# EAGLE board Expanssion Bay (EAGLE 9.5.1)
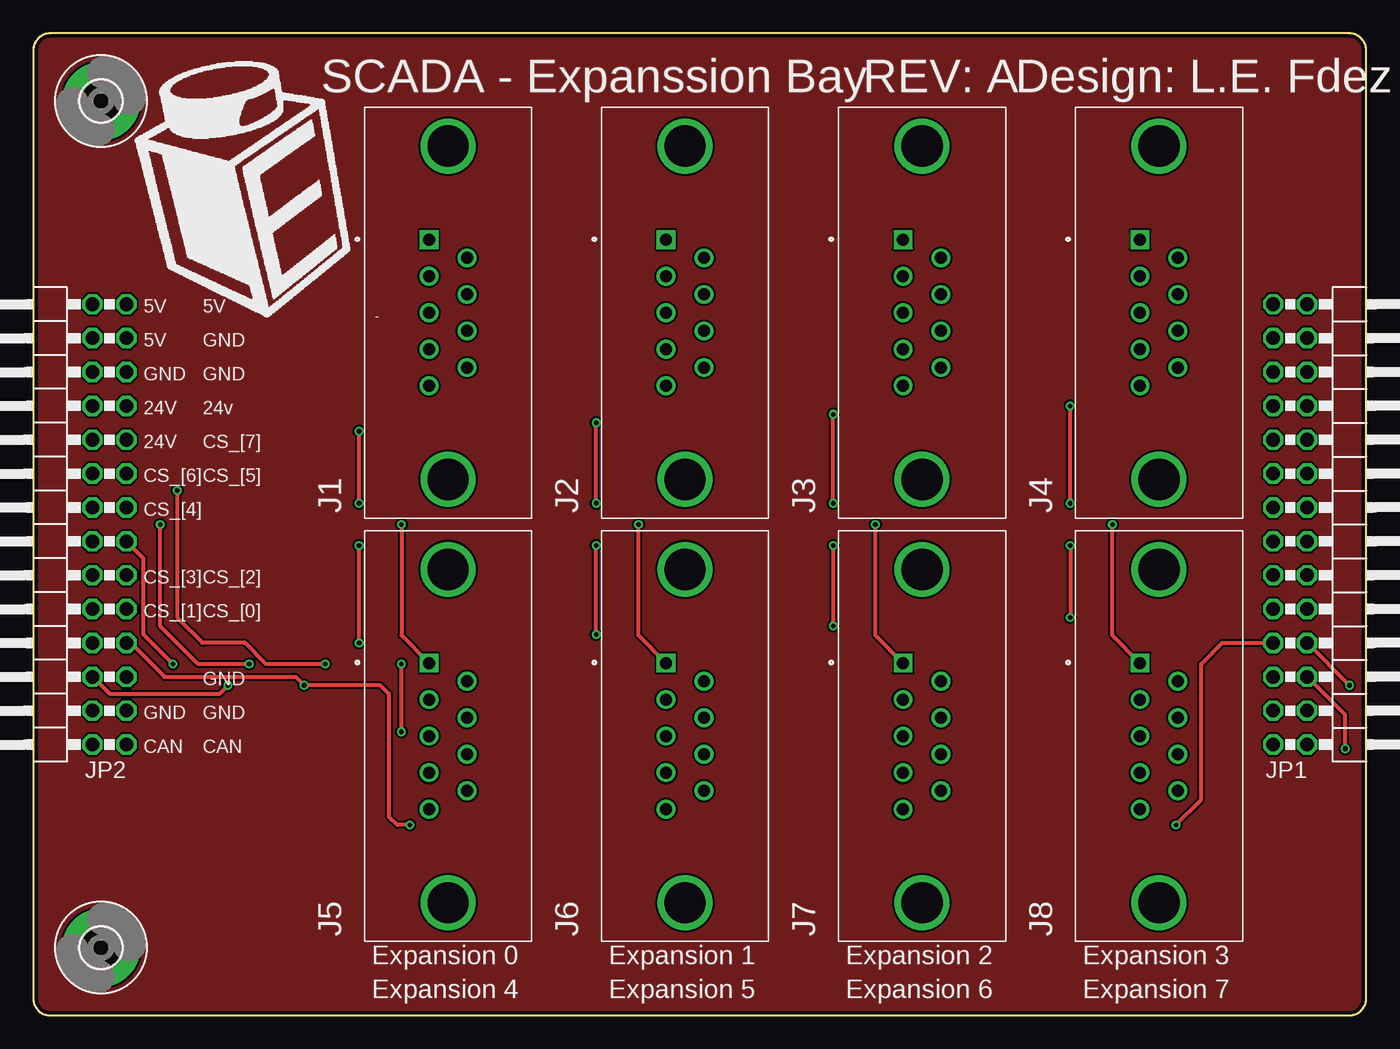
[diagram p0: board, top side]
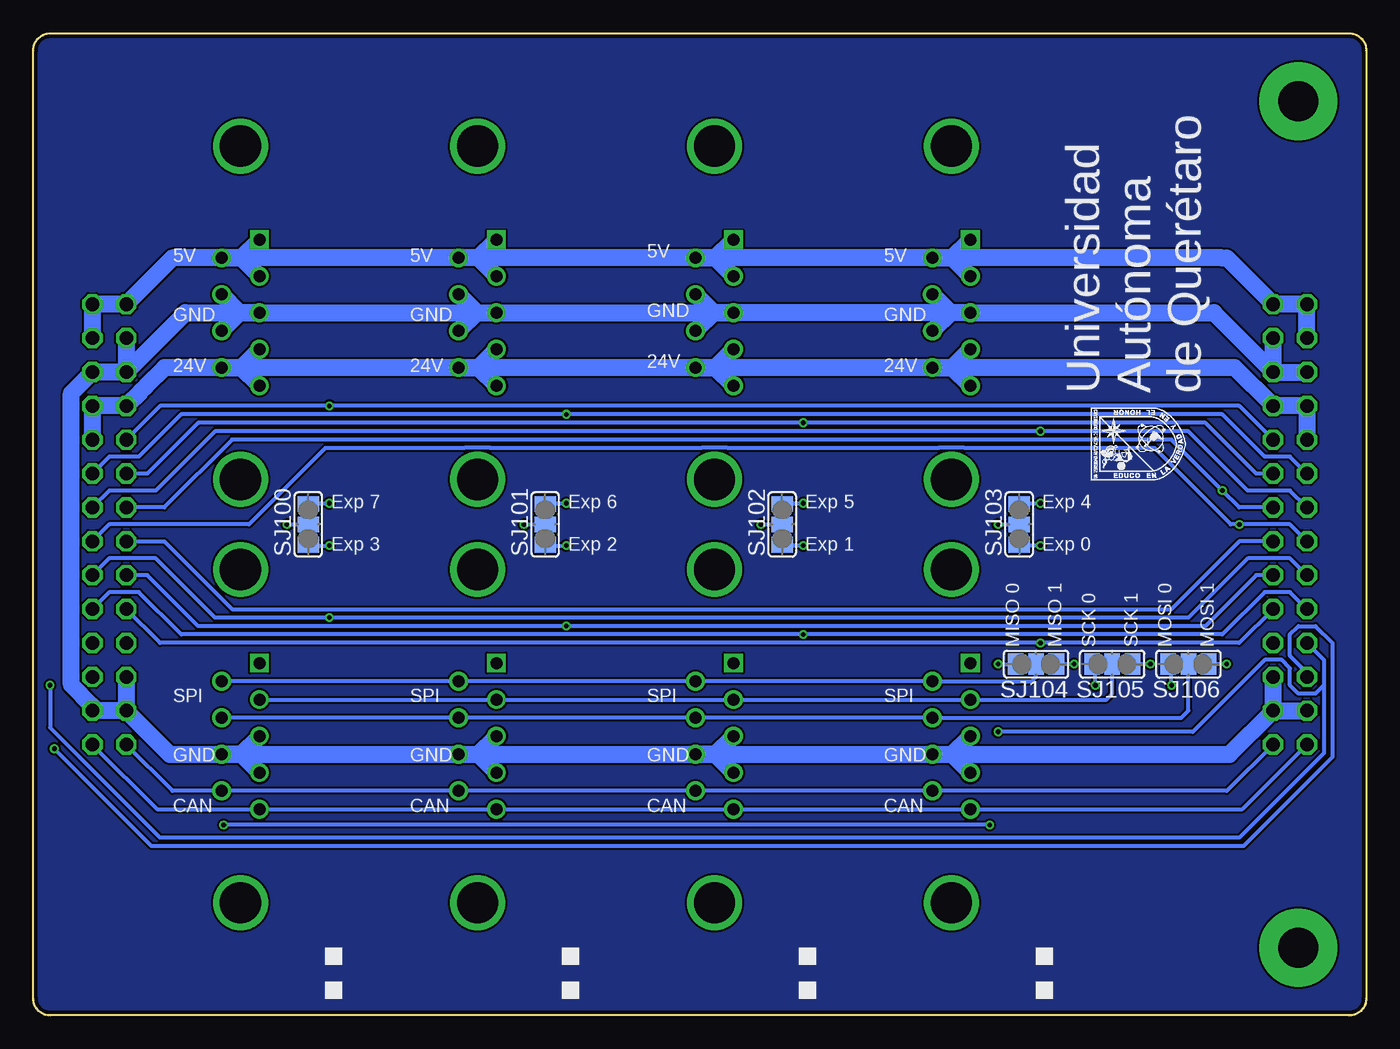
[diagram p1: board, bottom side, seen from below]

Size 100 x 73.66 mm. Coordinates in mm from the lower left corner, seen from the top.
Outline: 0,72.39 0,1.27 arc90 1.27,0 98.73,0 arc90 100,1.27 100,72.39 arc90 98.73,73.66 1.27,73.66 arc90 0,72.39
Copper layers (1*16): Top 0.035mm / dielectric 1.5mm / Bottom 0.035mm
Design rules "SeeedStudio_2layer_DRU_no_angle_20140221": minimum track width 6mil, minimum drill 12mil, track to track 6mil, track to pad 6mil, pad to pad 6mil, via to via 6mil, smd to smd 0mil, copper to edge 10mil, drill to drill 10mil, minimum pad ring 10mil, minimum via ring 6mil, stop-mask expansion 2mil, vias tented up to drill 100mil, thermal gap 10mil

## Footprints (pad centres in the part's own frame; a part is rotated, then mirrored left to right if it is on the bottom)
3,0-PAD = drill 3 pad 5.842: B3,0 0,0
LD09S24A4GV00LF = drill 0.9 square: 1 5.48,1.42 | drill 0.9: 2 2.74,1.42; 3 0,1.42; 4 -2.74,1.42; 5 -5.48,1.42; 6 4.11,-1.42; 7 1.37,-1.42; 8 -1.37,-1.42; 9 -4.11,-1.42 | drill 3.1: MH1 -12.495,0; MH2 12.495,0
2X14/90 = drill 1.016 octagon: 1 -16.51,-6.35; 2 -16.51,-3.81; 3 -13.97,-6.35; 4 -13.97,-3.81; 5 -11.43,-6.35; 6 -11.43,-3.81; 7 -8.89,-6.35; 8 -8.89,-3.81; 9 -6.35,-6.35; 10 -6.35,-3.81; 11 -3.81,-6.35; 12 -3.81,-3.81; 13 -1.27,-6.35; 14 -1.27,-3.81; 15 1.27,-6.35; 16 1.27,-3.81; 17 3.81,-6.35; 18 3.81,-3.81; 19 6.35,-6.35; 20 6.35,-3.81; 21 8.89,-6.35; 22 8.89,-3.81; 23 11.43,-6.35; 24 11.43,-3.81; 25 13.97,-6.35; 26 13.97,-3.81; 27 16.51,-6.35; 28 16.51,-3.81
SJ_2 = smd 1.168 x 1.6: 1 -1.524,0; 2 0,0; 3 1.524,0

## Placement (x,y rotation side)
H1  MOUNT-PAD-ROUND3.0  [3,0-PAD]  5.08,68.58 0 top
H2  MOUNT-PAD-ROUND3.0  [3,0-PAD]  5.08,5.08 0 top
J1  LD09S24A4GV00LF  [LD09S24A4GV00LF]  31.11,52.7 90 top
J2  LD09S24A4GV00LF  [LD09S24A4GV00LF]  48.9,52.7 90 top
J3  LD09S24A4GV00LF  [LD09S24A4GV00LF]  66.67,52.7 90 top
J4  LD09S24A4GV00LF  [LD09S24A4GV00LF]  84.45,52.7 90 top
J5  LD09S24A4GV00LF  [LD09S24A4GV00LF]  31.11,20.95 90 top
J6  LD09S24A4GV00LF  [LD09S24A4GV00LF]  48.9,20.95 90 top
J7  LD09S24A4GV00LF  [LD09S24A4GV00LF]  66.67,20.95 90 top
J8  LD09S24A4GV00LF  [LD09S24A4GV00LF]  84.45,20.95 90 top
JP1  [2X14/90]  99.38,36.83 270 top
JP2  [2X14/90]  0.64,36.83 90 top
SJ100  [SJ_2]  79.38,36.83 90 bottom
SJ101  [SJ_2]  61.59,36.83 90 bottom
SJ102  [SJ_2]  43.81,36.83 90 bottom
SJ103  [SJ_2]  26.04,36.83 90 bottom
SJ104  [SJ_2]  24.77,26.35 0 bottom
SJ105  [SJ_2]  19.05,26.35 0 bottom
SJ106  [SJ_2]  13.34,26.35 0 bottom

## Library data of the parts
H1 H2 = holes
J1-J8 = D-Sub Connectors; CREATED_BY: PCBLayout.com; DIGIKEY_PART_NUMBER: 609-5190-ND; MANUFACTURER: Amphenol ICC (FCI); MPN: LD09S24A4GV00LF
JP1 JP2 = pinhead
SJ100-SJ106 = jumper

## Nets
+24V: J1.4 J1.5 J1.9 J2.4 J2.5 J2.9 J3.4 J3.5 J3.9 J4.4 J4.5 J4.9 JP1.7 JP1.8 JP1.10 JP2.20 JP2.21 JP2.22
AGND: J1.3 J1.7 J1.8 J2.3 J2.7 J2.8 J3.3 J3.7 J3.8 J4.3 J4.7 J4.8 J5.3 J5.4 J5.8 J6.3 J6.4 J6.8 J7.3 J7.4 J7.8 J8.3 J8.4 J8.8 JP1.3 JP1.5 JP1.6 JP1.23 JP1.25 JP1.26 JP2.3 JP2.4 JP2.5 JP2.23 JP2.24 JP2.25
CAN_H: J5.5 J6.5 J7.5 J8.5 JP1.28 JP2.2
CAN_L: J5.9 J6.9 J7.9 J8.9 JP1.27 JP2.1
CS_0: JP1.19 JP2.9 SJ103.1
CS_1: JP1.20 JP2.10 SJ102.1
CS_2: JP1.17 JP2.11 SJ101.1
CS_3: JP1.18 JP2.12 SJ100.1
CS_4: JP1.14 JP2.16 SJ103.3
CS_5: JP1.11 JP2.17 SJ102.3
CS_6: JP1.12 JP2.18 SJ101.3
CS_7: JP1.9 JP2.19 SJ100.3
CS_A: J5.1 SJ103.2
CS_B: J6.1 SJ102.2
CS_C: J7.1 SJ101.2
CS_D: J8.1 SJ100.2
MISO: J5.6 J6.6 J7.6 J8.6 SJ104.2
MISO_0: JP1.22 JP2.8 SJ104.1
MISO_1: JP1.13 JP2.15 SJ104.3
MOSI: J5.7 J6.7 J7.7 J8.7 SJ106.2
MOSI_0: JP1.24 JP2.6 SJ106.1
MOSI_1: JP1.15 JP2.13 SJ106.3
SCK: J5.2 J6.2 J7.2 J8.2 SJ105.2
SCK_0: JP1.21 JP2.7 SJ105.1
SCK_1: JP1.16 JP2.14 SJ105.3
VCCA: J1.1 J1.2 J1.6 J2.1 J2.2 J2.6 J3.1 J3.2 J3.6 J4.1 J4.2 J4.6 JP1.1 JP1.2 JP1.4 JP2.26 JP2.27 JP2.28

## Tracks (layer width: path | path; a pad name or v marks a point on that pad's centre or on a via)
+24V
  Bottom 0.61: 91.6,47.15 91.92,46.83
  Bottom 1.27: JP2.20 JP2.22 JP2.21 9.86,48.59 J1.9 | J1.9 J2.9 | J2.9 J3.9 | J3.9 J4.9 | J4.9 90.15,48.59 91.6,47.15 | 91.92,46.83 JP1.7 JP1.8 JP1.10 | J4.5 84.41,48.59 | J4.9 84.41,48.59 | 84.41,48.59 J4.4 | 66.62,48.59 J3.4 | 31.07,48.59 J1.4 | J1.9 31.07,48.59 | 31.07,48.59 J1.5 | 48.84,48.59 J2.4 | J2.9 48.84,48.59 | 48.84,48.59 J2.5 | J3.9 66.62,48.59 | 66.62,48.59 J3.5
AGND
  Bottom 0.61: J1.3 29.77,52.63 29.84,52.7 J2.3 47.62,52.7
  Bottom 1.27: JP1.3 JP1.5 | JP1.5 JP1.6 97.16,46.67 97.16,24.8 95.57,23.21 JP1.26 JP1.25 | JP1.5 88.58,52.7 J4.3 | J4.3 J3.3 | J3.3 47.62,52.7 J1.3 | J1.3 11.43,52.7 JP2.23 | JP2.23 JP2.25 | JP2.23 JP2.24 | JP1.23 JP1.25 | JP1.25 89.75,19.59 J8.8 | J8.8 J7.8 | J7.8 J6.8 | J6.8 J5.8 | J5.8 10.26,19.59 JP2.3 | JP2.3 JP2.5 | JP2.3 JP2.4 | 31.07,19.59 J5.3 | J5.8 31.07,19.59 | 31.07,19.59 J5.4 | 48.84,19.59 J6.3 | J6.4 48.84,19.59 | 48.84,19.59 J6.8 | J7.4 66.62,19.59 | J7.8 66.62,19.59 | 66.62,19.59 J7.3 | 84.41,19.59 J8.3 | J8.4 84.41,19.59 | 84.41,19.59 J8.8 | J3.8 66.72,52.7 | J3.7 66.72,52.7 | 66.72,52.7 J3.3 | J4.8 84.5,52.7 | J4.3 84.5,52.7 | 84.5,52.7 J4.7 | 31.16,52.7 J1.7 | J1.3 31.16,52.7 | 31.16,52.7 J1.8 | 48.95,52.7 J2.8 | J2.3 48.95,52.7 | 48.95,52.7 J2.7
CAN_H
  Bottom 0.305: JP1.28 90.72,15.47 J8.5 J7.5 J6.5 J5.5 9.29,15.47 JP2.2
CAN_L
  Bottom 0.305: JP1.27 89.55,16.84 J8.9 J7.9 J6.9 J5.9 10.46,16.84 JP2.1
COPPER
  pour Top: 98.42,73.66 1.27,73.66 arc90 0,72.39 0,1.27 arc90 1.27,0 98.73,0 arc90 100,1.27 100,2 100,71 100,72 100,72.39 arc90 98.73,73.66
  pour Bottom: 100,1.27 100,72.39 arc90 98.73,73.66 1.27,73.66 arc90 0,72.39 0,1.27 arc90 1.27,0 98.73,0 arc90
CS_0  (via drill 0.35)
  Top 0.305: v24.45,27.94 v24.45,35.24
  Bottom 0.305: JP2.9 9.53,27.94 v24.45,27.94 90.49,27.94 JP1.19 | v24.45,35.24 25.97,35.24 SJ103.1
CS_1  (via drill 0.35)
  Top 0.305: v42.23,28.57 v42.23,35.24
  Bottom 0.305: JP2.10 5.71,31.75 7.62,31.75 10.79,28.57 v42.23,28.57 88.9,28.57 92.08,31.75 94.3,31.75 JP1.20 | v42.23,35.24 43.75,35.24 SJ102.1
CS_2  (via drill 0.35)
  Top 0.305: v60.01,35.24 v60.01,29.21
  Bottom 0.305: JP2.11 8.26,33.02 12.06,29.21 v60.01,29.21 87.63,29.21 91.44,33.02 JP1.17 | SJ101.1 61.53,35.24 v60.01,35.24
CS_3  (via drill 0.35)
  Top 0.305: v77.79,35.24 v77.79,29.84
  Bottom 0.305: JP2.12 5.71,34.29 8.89,34.29 13.34,29.84 v77.79,29.84 86.36,29.84 90.81,34.29 94.3,34.29 JP1.18 | SJ100.1 79.31,35.24 v77.79,35.24
CS_4  (via drill 0.35)
  Top 0.305: v24.45,38.42 v24.45,43.81
  Bottom 0.305: JP2.16 5.71,39.37 8.89,39.37 13.34,43.81 v24.45,43.81 86.36,43.81 90.81,39.37 94.3,39.37 JP1.14 | SJ103.3 25.97,38.42 v24.45,38.42
CS_5  (via drill 0.35)
  Top 0.305: v42.23,38.42 v42.23,44.45
  Bottom 0.305: JP2.17 8.26,40.64 12.06,44.45 v42.23,44.45 87.63,44.45 91.44,40.64 JP1.11 | SJ102.3 43.75,38.42 v42.23,38.42
CS_6  (via drill 0.35)
  Top 0.305: v60.01,38.42 v60.01,45.09
  Bottom 0.305: JP2.18 5.71,41.91 7.62,41.91 10.79,45.09 v60.01,45.09 88.9,45.09 92.08,41.91 94.3,41.91 JP1.12 | SJ101.3 61.53,38.42 v60.01,38.42
CS_7  (via drill 0.35)
  Top 0.305: v77.79,38.42 v77.79,45.72
  Bottom 0.305: JP2.19 9.53,45.72 v77.79,45.72 90.49,45.72 JP1.9 | SJ100.3 79.31,38.42 v77.79,38.42
CS_A  (via drill 0.35)
  Top 0.305: J5.1 27.62,28.51 v27.62,36.83
  Bottom 0.305: v27.62,36.83 SJ103.2
CS_B  (via drill 0.35)
  Top 0.305: J6.1 45.4,28.51 v45.4,36.83
  Bottom 0.305: v45.4,36.83 SJ102.2
CS_C  (via drill 0.35)
  Top 0.305: J7.1 63.18,28.51 v63.18,36.83
  Bottom 0.305: v63.18,36.83 SJ101.2
CS_D  (via drill 0.35)
  Top 0.305: J8.1 80.96,28.51 v80.96,36.83
  Bottom 0.305: v80.96,36.83 SJ100.2
MISO
  Bottom 0.305: J8.6 J7.6 J6.6 J5.6 25.1,25.07 24.77,25.4 SJ104.2
MISO_0  (via drill 0.35)
  Top 0.305: v27.62,21.27 v27.62,26.35 | v98.74,24.77 JP1.22
  Bottom 0.305: v27.62,26.35 SJ104.1 | v27.62,21.27 13.02,21.27 7.62,26.67 6.35,26.67 5.71,26.04 5.71,24.77 5.08,24.13 3.81,24.13 3.17,24.77 | 3.17,24.77 3.17,26.67 JP2.8 | v98.74,24.77 98.74,21.59 90.49,13.34 9.53,13.34 3.17,19.68 3.17,24.77
MISO_1  (via drill 0.35)
  Top 0.305: v10.79,39.37 10.79,29.84 12.7,27.94 15.88,27.94 17.46,26.35 v21.91,26.35
  Bottom 0.305: JP2.15 9.53,38.1 v10.79,39.37 14.61,43.18 85.09,43.18 90.17,38.1 JP1.13 | v21.91,26.35 SJ104.3
MOSI
  Bottom 0.305: J8.7 J7.7 J6.7 J5.7 13.87,22.32 13.34,22.86 SJ106.2
MOSI_0  (via drill 0.35)
  Top 0.305: v14.61,24.77 13.97,24.13 5.71,24.13 JP2.6 | JP1.24 98.42,22.54 v98.42,20
  Bottom 0.305: v14.61,24.77 14.61,26.35 SJ106.1 | v98.42,20 91.12,12.7 9.21,12.7 2.54,19.37 2.54,27.94 3.81,29.21 5.08,29.21 5.71,28.57 5.71,26.99 4.45,25.72 JP2.6
MOSI_1  (via drill 0.35)
  Top 0.305: JP2.13 8.26,34.29 8.26,28.57 v10.48,26.35
  Bottom 0.305: JP2.13 9.53,35.56 14.61,30.48 85.09,30.48 90.17,35.56 JP1.15 | v10.48,26.35 SJ106.3
SCK
  Bottom 0.305: J8.2 J7.2 J6.2 J5.2 19.48,23.7 19.05,24.13 SJ105.2
SCK_0  (via drill 0.35)
  Top 0.305: JP2.7 7.3,27.94 9.84,25.4 19.68,25.4 v20.32,24.77 26.04,24.77 26.67,24.13 26.67,14.92 27.3,14.29 v28.26,14.29 | JP1.21 89.22,27.94 87.63,26.35 87.63,16.19 v85.72,14.29
  Bottom 0.305: v20.32,24.77 20.32,26.35 SJ105.1 | v28.26,14.29 v85.72,14.29
SCK_1  (via drill 0.35)
  Top 0.305: v16.19,26.35 12.38,26.35 9.53,29.21 v9.53,36.83
  Bottom 0.305: JP2.14 5.71,36.83 v9.53,36.83 10.16,36.83 15.88,42.55 30.11,42.55 30.14,42.57 32.09,42.57 32.12,42.55 47.89,42.55 47.92,42.57 49.87,42.57 49.9,42.55 65.67,42.55 65.7,42.57 67.65,42.57 67.68,42.55 78.11,42.55 83.82,36.83 94.3,36.83 JP1.16 | v16.19,26.35 SJ105.3
VCCA
  Bottom 0.61: 10.46,56.81 10.79,56.81
  Bottom 1.27: JP2.26 JP2.28 JP2.27 10.46,56.81 | 10.79,56.81 J1.6 | J1.6 J2.6 | J2.6 J3.6 | J3.6 J4.6 | J4.6 89.55,56.81 JP1.1 JP1.2 JP1.4 | 84.41,56.81 J4.2 | J4.6 84.41,56.81 | 84.41,56.81 J4.1 | 66.62,56.81 J3.1 | J3.2 66.62,56.81 | 66.62,56.81 J3.6 | 48.84,56.81 J2.1 | J2.6 48.84,56.81 | 48.84,56.81 J2.2 | 31.07,56.81 J1.1 | J1.6 31.07,56.81 | 31.07,56.81 J1.2

## Text on the board
tPlace: SCADA - Expanssion Bay | REV: A | Design: L.E. Fdez | 5V | 5V | 5V | GND | GND | GND | 24V | 24v | 24V | CS_[7] | CS_[6] | CS_[5] | CS_[4] | CS_[3] | CS_[2] | CS_[1] | CS_[0] | GND | GND | GND | CAN | CAN | Expansion 0 | Expansion 1 | Expansion 2 | Expansion 3 | Expansion 4 | Expansion 5 | Expansion 6 | Expansion 7
bPlace: 5V | 5V | 5V | 5V | GND | GND | GND | GND | 24V | 24V | 24V | 24V | Universidad / Autónoma / de Querétaro | Exp 4 | Exp 5 | Exp 6 | Exp 7 | Exp 0 | Exp 1 | Exp 2 | Exp 3 | MOSI 1 | MOSI 0 | SCK 1 | SCK 0 | MISO 1 | MISO 0 | SPI | SPI | SPI | SPI | GND | GND | GND | GND | CAN | CAN | CAN | CAN